# Altium PCB MB_v1.PcbDoc (part 10 of 10)
Units mm, origin at the board's own origin, x right, y up, seen from the top; angles counter-clockwise.
Board outline 203 x 72 mm, 6 copper layers (Top Layer, Layer 3, Layer 1, Layer 2, Layer 4, Bottom Layer), stack 1.52 mm thick; 655 components, 569 nets, 2943 pads, 1834 vias.
Unrouted connection lines stored in the file: 31.
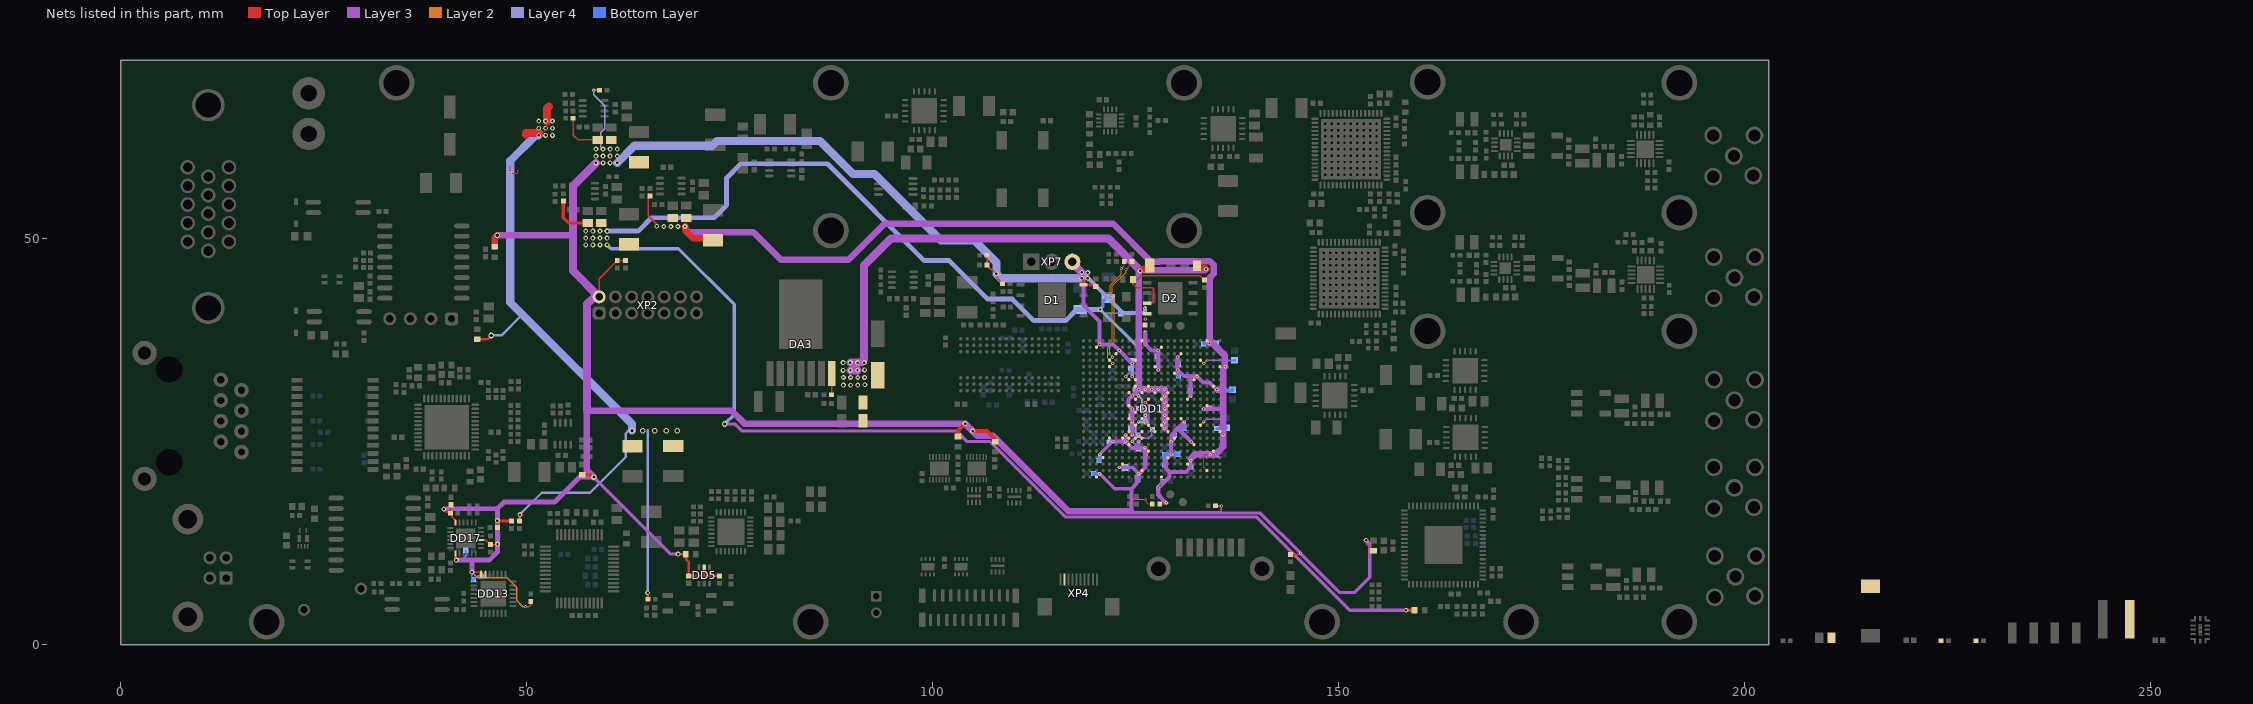
[diagram p13: the nets of this part, all layers, seen from the top]

## Via types
v1: diameter 0.4, hole 0.2, Top Layer to Bottom Layer, tented both sides, 654 vias
v2: diameter 0.8, hole 0.4, Top Layer to Bottom Layer, tented both sides, 489 vias
v3: diameter 0.6, hole 0.3, Top Layer to Bottom Layer, tented both sides, 354 vias
v4: diameter 0.7, hole 0.4, Top Layer to Bottom Layer, tented both sides, 144 vias
v5: diameter 0.8, hole 0.4, Top Layer to Bottom Layer, 87 vias
v6: diameter 0.9, hole 0.5, Top Layer to Bottom Layer, 45 vias
v7: diameter 0.66, hole 0.4, Top Layer to Bottom Layer, 25 vias
v8: diameter 0.7, hole 0.3, Top Layer to Bottom Layer, 13 vias
v9: diameter 0.5, hole 0.2, Top Layer to Bottom Layer, 12 vias
v10: diameter 0.5, hole 0.3, Top Layer to Bottom Layer, 5 vias
v11: diameter 1, hole 0.5, Top Layer to Bottom Layer, 2 vias
v12: diameter 0.4, hole 0.2, Top Layer to Bottom Layer, 2 vias
v13: diameter 0.9, hole 0.4, Top Layer to Bottom Layer, tented both sides, 2 vias

## Nets (pads, with @x,y where several pads share a name; then routed paths per layer and width w, separated by ;. In a path a pad name is that pad's centre, name@x,y a point inside that pad or via, vN(x,y) a via of type N, cw(c..) or ccw(c..) an arc to the next point about the centre after c; other vN are vias at no path point) (continued)
VDD_1V0: C19.2 C25.1 C42.2 C45.2 C47.2 C49.2 C51.2 C53.2 C55.2 C56.2 C60.2 C61.2 C63.2 DA3.7 DD1.G8 DD1.H9 DD1.H11 DD1.J8 DD1.J10 DD1.J12 DD1.J14 DD1.K13 DD1.L8 DD1.L14 DD1.M13 DD1.N8 DD1.N14 DD1.P13 DD1.R8 DD1.R14 R4.2 | length 108.8
  Top Layer w0.2: R4.2@87.55,30.775 87.61,30.835 DA3.7@87.61,33.37 ; v1(123.811,33.026) DD1.G8@124.212,32.625 ; DD1.R8@124.212,26.225 v1(124.613,25.824) ; DD1.N8@124.212,27.825 v1(124.613,27.424) ; DD1.L8@124.212,29.425 v1(124.613,29.024) ; DD1.J8@124.212,31.025 v1(124.613,30.624) ; DD1.H9@125.012,31.825 v1(125.413,31.424) ; DD1.J10@125.812,31.025 v1(126.213,31.426) ; DD1.H11@126.612,31.825 v1(127.013,31.424) ; DD1.J12@127.412,31.025 v1(127.813,31.426) ; DD1.P13@128.212,27.025 v1(128.613,27.426) ; DD1.M13@128.212,28.625 v1(128.613,29.026) ; DD1.K13@128.212,30.225 v1(128.613,30.626) ; v1(128.611,26.626) DD1.R14@129.012,26.225 ; v1(128.611,28.226) DD1.N14@129.012,27.825 ; v1(128.611,29.826) DD1.L14@129.012,29.425 ; v1(128.611,31.426) DD1.J14@129.012,31.025
  Top Layer w0.8: v3(125.576,46.024) 125.777,46.225 126.6,46.225 126.775,46.4 C45.2@126.775,46.675 ; C49.2@132.575,46.65 132.575,46.5 132.675,46.4 133.525,46.4 v3(133.7,46.225)
  Layer 3 w0.2: v1(123.811,33.026) 123.813,33.026 124.287,33.5 125.223,33.5 125.413,33.31
  Layer 3 w0.5: v1(124.613,25.824) v1(124.613,27.424) v1(124.613,29.024) 124.175,29.462 124.175,30.185 v1(124.613,30.624) v1(125.413,31.424)
  Layer 3 w0.6: v1@128.611,29.024 v1(128.613,29.026) ; v1(128.611,31.426) v1@128.613,31.424
  Layer 3 w0.8: 125.4,38.2 125.4,45.848 v3(125.576,46.024) ; 125.413,38.187 125.413,33.31 v1(125.413,31.424) v1@126.211,31.424 ; v3@125.576,46.101 133.576,46.101 v3(133.7,46.225) ; v1@126.216,31.424 v1(127.013,31.424) ; v1@127.013,31.426 v1(127.813,31.426) v1(128.611,31.426) ; v1(128.611,26.626) v1(128.611,28.226) v1@128.611,29.024 ; v1(128.613,29.026) v1(128.613,30.626) v1@128.613,31.424
  Layer 3 w1: v3(89.9,34.725) 89.925,34.75 v3@90.675,34.75 ; v3(89.905,33.77) 90.754,33.77 v3(90.769,33.785) ; 90.35,33.785 90.35,34.725 ; v3(90.775,34.725) 91.206,34.725 91.575,35.094 91.575,46.7 94.875,50 121.677,50 v3@125.576,46.101
  Bottom Layer w0.2: v1(123.811,33.026) 124.305,33.521 124.305,33.815 C63.2@124.49,34
  Bottom Layer w0.3: C60.2@124.49,28.215 124.613,28.092 v1(124.613,27.424) ; C56.2@124.494,26.65 124.613,26.531 v1(124.613,25.824)
  other v3: 89.025,31.95 89.93,31.945 90.794,31.96 91.675,32 89.025,32.9 89.925,32.9 90.8,32.9 91.65,32.9 89,33.775 91.65,33.825 89,34.725 91.625,34.725
VDD_1V8: C33.2 C39.2 C48.2 C50.2 C57.2 C59.2 C62.2 C64.2 DD1.K9 DD1.K11 DD1.L10 DD1.M9 DD1.N10 DD1.P9 DD1.P11 DD1.R10 DD1.T9 L4.2 L8.1 L46.1 R13.2 | length 242.3
  Top Layer w0.2: v1(124.611,25.024) DD1.T9@125.012,25.425 ; DD1.P9@125.012,27.025 v1(125.413,27.426) ; DD1.M9@125.012,28.625 v1(125.413,29.026) ; DD1.K9@125.012,30.225 v1(125.413,30.626) ; v1(125.411,25.824) DD1.R10@125.812,26.225 ; DD1.N10@125.812,27.825 v1(126.213,28.226) ; DD1.L10@125.812,29.425 v1(126.213,29.024) ; v1(126.211,27.426) DD1.P11@126.612,27.025
  Top Layer w0.4: R13.2@54.536,54.637 54.536,52.589 55.201,51.924 C39.2@57.545,51.924 ; v3(158.326,4.225) L46.1@159.375,4.225
  Layer 3 w0.4: v4(74.425,27.175) 75.675,27.175 76.55,26.3 103,26.3 104.3,25 107.1,25 116.4,15.7 139.95,15.7 151.425,4.225 v3(158.326,4.225)
  Layer 4 w0.2: v1(125.411,25.824) 125.013,26.221 125.013,27.026 v1(125.413,27.426) ; v1(125.413,29.026) v1@125.415,29.025 ; v1(125.413,30.626) 125.813,30.226 125.813,29.025 ; v1(126.211,27.426) v1@126.212,27.428 ; v1@126.212,28.225 v1(126.213,28.226) ; v1(126.213,29.024) v1(126.213,29.024)
  Layer 4 w0.4: v3(59.925,49.225) 60.4,48.75 68.725,48.75 75.575,41.9 75.575,28.325 v4(74.425,27.175) ; v3(120.675,41.275) 125.275,36.675 125.275,32.075 124.875,31.675 124.875,31.165 v1(125.413,30.626) ; v1(124.611,25.024) v1(125.411,25.824) ; v1(125.413,27.426) v1(126.211,27.426) ; v1@125.415,29.025 125.813,29.025 v1(126.213,29.024) ; v1@126.212,27.428 v1@126.212,28.225 ; v1(126.213,28.226) v1(126.213,29.024)
  Layer 4 w0.6: v3(59.925,50.925) 63.75,50.925 65.4,52.575 73.1,52.575 74.65,54.125 74.65,57.475 76.4,59.225 87.075,59.225 99.013,47.287 102.059,47.287 106.796,42.55 109.843,42.55 112.483,39.91 116.425,39.91 117.79,41.275 v3(120.675,41.275)
  Bottom Layer w0.2: v3@120.728,41.275 121.203,40.8 L8.1@123.195,40.8 ; v1(124.611,25.024) 125.011,24.624 125.293,24.624 125.411,24.506 125.411,24.08 C62.2@125.402,24.072
  Bottom Layer w0.4: C50.2@118.2,41.275 v3(120.675,41.275) ; v3@120.713,41.329 120.713,41.367 121,41.654 121,42.25 121.375,42.625 C48.2@121.65,42.625
  other v3: 57.3,49.225 58.175,49.225 59.05,49.225 57.3,50.075 58.175,50.075 59.05,50.075 59.925,50.075 57.3,50.925 58.175,50.925 59.05,50.925
VDD_2V5: C30.2 C36.2 C134.2 C135.2 C138.2 C139.2 C142.2 C143.2 C145.2 C147.2 C148.2 C149.2 C150.2 C151.2 C152.2 C153.2 C154.2 C156.2 C157.2 C158.2 C159.2 C160.2 C161.2 DD1.A20 DD1.AA20 DD1.AB13 DD1.C16 DD1.D19 DD1.E22 DD1.F15 DD1.G18 DD1.H21 DD1.K17 DD1.L20 DD1.N16 DD1.P19 DD1.R22 DD1.T15 DD1.U18 DD1.V21 DD1.W14 DD1.Y17 L1.2 R7.2 R61.2 | length 177.8
  Top Layer w0.125: v1(127.817,19.292) 128.212,19.687 DD1.AB13@128.212,20.625 ; DD1.AA20@133.807,21.425 133.4,21.832 133.4,23.161 133.651,23.413 134.197,23.413 v1(134.211,23.399)
  Top Layer w0.2: R7.2@65.228,55.264 65.028,55.064 65.028,54.975 65,54.947 65,52.825 66.05,51.775 v3(66.05,51.525) ; R61.2@128,17.325 128.608,17.325 128.746,17.462 v1(128.8,17.462) ; DD1.W14@129.012,23.025 v1(129.413,23.426) ; v1(129.425,25) 129.425,25.019 129.812,25.406 DD1.T15@129.812,25.425 ; DD1.F15@129.812,33.425 v1(130.213,33.826) ; v1@130.213,35.425 DD1.C16@130.612,35.825 ; DD1.N16@130.612,27.825 v1(131.013,27.424) ; DD1.Y17@131.412,22.225 v1(131.813,22.626) ; DD1.K17@131.412,30.225 v1(131.813,30.626) ; v1(131.885,24.952) DD1.U18@132.212,24.625 ; DD1.G18@132.212,32.625 132.212,32.643 132.613,33.045 v1(132.613,33.063) ; DD1.P19@133.012,27.025 v1(133.413,27.426) ; DD1.D19@133.012,35.025 v1(133.413,34.624) ; v1(133.411,29.024) DD1.L20@133.812,29.425 ; DD1.A20@133.812,37.425 v1(134.132,37.105) ; v1(134.211,23.399) 134.211,23.424 DD1.V21@134.612,23.825 ; DD1.H21@134.612,31.825 v1(135.013,31.424) ; DD1.R22@135.412,26.225 v1(135.813,25.824) ; DD1.E22@135.412,34.225 v1(136.075,34.225)
  Top Layer w0.8: v3(69.525,51.5) 69.525,51.025 70.525,50.025 72.75,50.025 L1.2@72.975,49.8
  Layer 3 w0.2: v1(133.413,27.426) 133.762,27.775 135.813,27.775 ; v1(133.413,34.624) 133.813,35.024 135.179,35.024 135.19,35.034 135.981,35.034 136.025,34.99
  Layer 3 w0.5: v1(128.8,17.462) 127.817,18.445 v1(127.817,19.292) 129.189,20.664 129.189,21.274 ; v1(130.213,35.424) v1(130.213,35.424) v1(130.213,33.826) 130.977,33.063 131.795,33.063 ; v1(131.013,27.424) 130.219,26.629 ; v1(131.813,22.626) 131.813,21.846 131.241,21.274 129.189,21.274 ; v1(131.813,30.626) 131.795,30.644 131.795,33.063 ; v1(131.885,24.952) 131.885,24.964 130.219,26.629 ; v1(133.411,29.024) 135.8,29.024 ; v1(135.013,31.424) 134.137,32.3 133.325,32.3 132.613,33.011 v1(132.613,33.063) 131.795,33.063 ; 129.189,21.274 128.775,21.687 128.775,22.788 v1(129.413,23.426) 129.413,24.988 v1(129.425,25) 129.425,25.835 130.219,26.629
  Layer 3 w0.8: 69.525,51.2 69.95,50.775 77.959,50.775 81.309,47.425 89.7,47.425 94.1,51.825 122.27,51.825 126.927,47.168 127.86,47.168 127.917,47.225 134.181,47.225 134.65,46.756 134.65,45.675 134.132,45.157 v1(134.132,37.105) 134.495,37.105 136.025,35.575 136.025,34.99 v1@136.025,34.275 ; 131.813,22.88 132.357,23.424 134.186,23.424 v1(134.211,23.399) ; v1@134.211,23.424 134.856,23.424 135.813,24.381 v1(135.813,25.824) 135.813,27.775 135.813,33.963 v1(136.075,34.225) ; v1@135.062,31.375 135.733,31.375
  Bottom Layer w0.3: v1(131.813,22.626) 131.825,22.615 C134.2@131.825,21.87 ; C138.2@133.383,37.037 C138.2@133.45,37.105 ; C150.2@133.509,23.37 133.537,23.399 v1(134.211,23.399) 134.951,23.399 C143.2@134.98,23.37 ; C142.2@134.92,37.105 C142.2@134.95,37.135 ; C152.2@135.024,26.61 135.569,26.61 ; 135.569,26.613 135.569,26.61 ; v1(135.813,25.824) 135.569,26.068 135.569,26.61 ; v1(136.075,34.225) 136.075,34.94 C149.2@136.025,34.99 137.215,34.99 C161.2@137.225,35 ; C160.2@136.25,26.72 136.139,26.61 135.569,26.61
  Bottom Layer w0.4: v1(127.817,19.292) 127.817,19.497 C153.2@128.413,20.092 ; C156.2@130.213,33.147 v1(130.213,33.826) ; C159.2@130.213,34.673 v1(130.213,35.424) ; C138.2@133.45,37.105 v1(134.132,37.105) C142.2@134.92,37.105
  Bottom Layer w0.5: C148.2@128.575,22.135 128.588,22.148 128.588,23.4 C135.2@128.6,23.413 128.614,23.426 v1(129.413,23.426) 130.216,23.426 C139.2@130.225,23.435 ; v1(129.425,25) 129.742,25.317 129.742,25.695 C147.2@129.812,25.765 ; C156.2@130.213,33.147 C156.2@130.275,33.085 ; C159.2@130.213,34.673 C159.2@130.285,34.6 ; C158.2@131,26.61 131.013,26.624 v1(131.013,27.424) ; C151.2@131.754,31.303 131.795,31.261 131.795,30.645 v1(131.813,30.626) ; v1(133.411,29.024) 133.752,29.024 133.759,29.03 134.045,29.03 C157.2@134.115,29.1 ; v1(135.013,31.424) 135.462,31.424 C154.2@135.825,31.061 136.079,31.315 136.877,31.315 C145.2@136.975,31.413
  other v3: 66.9,51.5 67.775,51.5 68.65,51.5
VDD_3V3: C5.2 C32.2 C34.2 C38.2 C40.2 C66.2 C68.2 C69.2 C71.2 C75.2 C81.2 C111.2 C132.2 C133.2 C136.2 C140.2 C144.2 D1.8 D2.7 D2.8 DD1.A10 DD1.AA10 DD1.AB3 DD1.B3 DD1.B13 DD1.C6 DD1.D9 DD1.E12 DD1.G9 DD1.R12 DD1.T5 DD1.T7 DD1.T8 DD1.T10 DD1.U8 DD1.V11 DD1.W4 DD1.Y7 DD5.5 DD13.6 DD13.7 DD17.1 DD17.9 DD17.18 L5.2 L9.1 L11.1 L12.1 L13.1 L17.1 L48.1 L60.1 R15.2 R20.1 R21.1 R22.2 R23.1 R24.1 R25.1 R26.1 R27.2 R28.2 R31.1 R32.1 R37.2 R59.2 R160.2 R162.2 R163.2 R165.2 R172.2 XP2.2 XP7.3 | length 448.2
  Top Layer w0.125: v1(126.25,17.875) 126.25,17.625 126.55,17.325 R24.1@127.075,17.325
  Top Layer w0.2: v3(39.8,16.675) 40.18,16.295 40.505,16.295 R165.2@40.625,16.175 ; C111.2@40.7,17.215 40.625,17.14 R165.2@40.625,16.175 ; DD17.1@41.25,11.225 41.256,11.219 41.256,10.624 41.369,10.511 v3(41.369,10.402) ; DD17.18@41.25,15.025 41.25,15.298 41.235,15.313 41.235,15.315 40.812,15.738 40.812,15.988 R165.2@40.625,16.175 ; v3@43.275,8.9 44.402,8.9 DD13.7@44.415,8.914 ; DD17.9@44.4,12.875 44.925,12.875 45,12.8 45.06,12.8 C32.2@45.55,12.31 46.36,12.31 v3(46.425,12.375) ; DD13.7@44.415,8.965 DD13.7@44.415,8.914 ; DD13.6@44.925,8.65 DD13.7@44.425,8.65 44.415,8.66 DD13.7@44.415,8.914 ; R163.2@46.425,14.4 v3@46.425,15.25 ; v1(49.875,4.675) 50.3,4.675 50.575,4.95 50.575,5.275 R162.2@50.525,5.325 ; R15.2@55.73,64.835 55.75,64.815 55.75,62.75 56.33,62.17 C40.2@58.786,62.17 ; v1(58.275,68.275) 58.287,68.287 R28.2@58.992,68.287 ; XP2.2@58.95,42.825 58.95,45.075 R20.1@61.175,47.3 R21.1@62.2,47.3 ; R32.1@106.725,47.95 106.725,46.766 R31.1@106.7,46.741 107.791,45.65 v3(107.875,45.65) 107.952,45.573 107.952,45.148 R22.2@108.65,44.45 ; DD1.AB3@120.212,20.625 v1(120.613,21.026) ; DD1.B3@120.212,36.625 DD1.B3@120.212,36.625 120.575,36.986 v1(120.577,36.986) ; v1(120.611,23.426) DD1.W4@121.012,23.025 ; DD1.T5@121.81,25.423 v1(122.212,25.022) ; DD1.C6@122.612,35.825 v1(123.013,36.226) ; v1(123.011,21.824) DD1.Y7@123.412,22.225 ; DD1.T7@123.412,25.425 v1(123.813,25.826) ; v1(123.811,25.024) DD1.T8@124.212,25.425 ; v1@123.813,25.028 123.814,25.027 DD1.U8@124.214,24.627 ; v1(124.61,33.026) DD1.G9@125.012,32.625 ; v1(124.611,34.624) DD1.D9@125.012,35.025 ; v1(125.411,25.024) DD1.T10@125.812,25.425 ; v1(125.423,21.029) 125.812,21.418 DD1.AA10@125.812,21.425 ; DD1.A10@125.812,37.425 v1(126.213,37.024) ; v1(126.213,24.228) DD1.V11@126.614,23.827 ; v1(126.213,29.824) v1(126.213,29.824) 126.612,30.224 126.612,30.225 ; D2.7@126.468,42.037 126.525,42.094 127.176,42.094 127.225,42.143 127.225,43.8 127.075,43.95 125.175,43.95 124.705,44.42 L9.1@124.705,44.95 125.238,44.95 125.713,45.425 132.97,45.425 R26.1@133.495,44.9 ; v1(127.011,26.626) DD1.R12@127.412,26.225 ; DD1.E12@127.412,34.225 v1(127.813,33.824) ; v1(127.811,36.224) DD1.B13@128.212,36.625 ; R59.2@134.875,17.1 134.9,17.075 v1(135.575,17.075) ; R23.1@144.125,11.1 145.146,11.1 145.296,11.25 v1(145.35,11.25) ; v3(153.425,12.85) 153.454,12.821 153.454,12.431 154.003,11.882 154.003,11.807 154.248,11.562 L48.1@154.323,11.562
  Top Layer w0.3: v3(68.675,11.15) 68.699,11.126 L60.1@69.605,11.126 69.693,11.038 69.693,10.432 69.977,10.148 C81.2@69.977,8.461 71.877,8.461 ; DD5.5@71.882,9.534 71.882,8.466 71.877,8.461 ; R37.2@73.787,8.451 73.777,8.461 71.877,8.461 ; v3(118.375,45.125) 118.6,44.9 118.6,44.42 118.666,44.354 119.321,44.354 119.45,44.225 120.015,44.225 C66.2@120.125,44.115
  Top Layer w0.4: v3(46.41,15.265) 46.425,15.25 46.443,15.232 48.118,15.232 R172.2@48.15,15.2 ; L17.1@56.655,20.775 56.8,20.92 L17.1@56.875,20.92 57.924,20.92 58.219,20.625 v4(58.3,20.625)
  Top Layer w0.5: L12.1@103.161,25.632 103.209,25.68 103.209,26.409 v3(104.025,27.225) ; v3(104.95,26.3) 106.725,26.3 107.563,25.462 107.563,25.084 107.658,24.989 L13.1@107.733,24.989
  Top Layer w0.8: L11.1@46.085,48.989 46.105,49.009 46.105,50.13 v4(46.389,50.414)
  Layer 3 w0.125: 124.5,17.775 124.6,17.875 v1(126.25,17.875)
  Layer 3 w0.2: v1(125.411,25.024) 125.811,25.424 126.611,25.424 127.011,25.824 v1(127.011,26.626) 126.613,27.024 126.613,29.423 v1(126.213,29.824) ; 135.55,16.2 135.575,16.225 v1(135.575,17.075)
  Layer 3 w0.4: v3@46.41,12.39 v3(46.425,12.375) ; v4(58.3,20.625) 67.775,11.15 v3(68.675,11.15) ; v1(120.613,21.026) 122.452,19.188 124.5,19.188 ; v1@120.616,23.426 v1(122.212,25.022) ; v1(123.011,21.824) 124.629,21.824 v1(125.423,21.029) ; 124.5,16.45 124.725,16.225 135.575,16.225 ; 135.55,16.2 140.4,16.2 v1(145.35,11.25) 145.35,11.2 150.15,6.4 151.95,6.4 153.854,8.304 153.854,12.421 v3(153.425,12.85)
  Layer 3 w0.5: 118.6,44.9 118.6,41.775 120.577,39.798 v1(120.577,36.986) 122.254,36.986 v1(123.013,36.226) 124.611,34.629 v1(124.611,34.624) ; v1(122.212,25.022) 123.809,25.022 v1(123.811,25.024) 123.811,25.824 v1(123.813,25.826) ; v1@123.813,25.028 124.613,24.228 125.409,24.228 ; 124.5,16.45 124.5,17.775 124.5,19.188 125.137,19.825 125.137,20.743 v1(125.423,21.029) 126.213,21.818 v1(126.213,24.228) 125.409,24.228 ; v1(125.411,25.024) 125.411,24.23 125.409,24.228 ; v1@126.213,38.472 v1(126.213,37.024) 127.014,36.224 v1(127.811,36.224) 127.813,36.221 v1(127.813,33.824)
  Layer 3 w0.6: v3(39.8,16.675) 39.86,16.735 46.41,16.735 ; v3(41.369,10.402) 43.386,10.402 ; v3(43.275,8.911) 43.275,10.292 43.386,10.402 ; v3@46.41,12.39 v3(46.41,15.265) 46.41,16.735 ; v3(46.425,12.375) 46.425,11.425 45.402,10.402 43.386,10.402 ; v4(58.3,20.625) 56.525,20.625 53.825,17.925 53.825,17.901 53.474,17.55 47.225,17.55 46.41,16.735
  Layer 3 w0.8: v4(46.389,50.414) 55.689,50.414 55.725,50.45 ; v4(58.3,20.625) 57.45,21.475 57.45,28.875 57.525,28.8 75.275,28.8 76.85,27.225 v3(104.025,27.225) v3(104.95,26.3) 105.5,25.75 107.425,25.75 116.725,16.45 124.5,16.45
  Layer 3 w1: 57.45,28.875 57.45,41.939 58.221,42.71 58.835,42.71 XP2.2@58.95,42.825 55.725,46.05 55.725,50.45 55.725,56.5 v3(58.55,59.325) ; XP7.3@117.24,47.15 117.24,47.01 v3(118.4,45.85)
  Layer 2 w0.2: v3(43.275,8.911) 43.969,8.216 47.609,8.216 48.775,7.05 48.775,5.442 49.542,4.675 v1(49.875,4.675)
  Layer 4 w0.2: v1(58.275,68.275) 58.275,67.717 59.62,66.372 59.62,63.545 59.125,63.05 59.125,61.325 v3(59.425,61.025)
  Layer 4 w0.4: v1(124.61,33.026) v1(124.611,34.624)
  Layer 4 w0.5: v3@119.15,45.075 119.225,45 119.275,45 123.45,40.825 126.175,40.825 v1(126.175,41.425)
  Layer 4 w1: v3(61.175,59.325) 63.3,61.45 72.875,61.45 73.45,62.025 86.15,62.025 90.2,57.975 92.85,57.975 101.075,49.75 105.2,49.75 107.875,47.075 v3(107.875,45.65) 108.4,45.125 v3(118.375,45.125) ; v3@118.4,45.363 118.55,45.363 118.713,45.363
  Bottom Layer w0.2: v3(41.369,10.402) 42.027,10.402 42.515,10.89 C38.2@42.515,11.625 ; v3(43.275,8.911) 43.275,7.989 43.396,7.868 43.396,7.946 R160.2@43.45,8 43.65,8.2 43.729,8.2 43.978,8.449 C5.2@44.514,8.449
  Bottom Layer w0.4: C136.2@119.914,21.026 v1(120.613,21.026) ; C132.2@120.611,22.686 v1(120.611,23.426) ; v1(123.011,21.824) C144.2@123.773,21.824 ; C133.2@125.423,20.372 v1(125.423,21.029) ; C75.2@126.215,23.595 v1@126.215,24.226 ; C69.2@127.69,35.475 127.81,35.595 v1(127.811,36.224)
  Bottom Layer w0.5: C136.2@119.858,21.082 C136.2@119.914,21.026 ; C132.2@120.519,22.686 C132.2@120.589,22.756 ; C144.2@123.773,21.824 C144.2@123.775,21.825 ; C133.2@125.335,20.275 C133.2@125.405,20.345 ; C75.2@126.215,23.595 C75.2@126.25,23.56
  other v1: 126.199,38.486 126.2,40.1
  other v3: 119.15,45.125 119.15,45.825 59.425,59.325 60.3,59.325 58.55,60.175 59.425,60.175 60.3,60.175 61.175,60.175 58.55,61.025 60.3,61.025 61.175,61.025
VDD_5V0: C?.1@215.537,7.176 C?.2@210.736,0.826 L10.1 L59.1 L62.1 L?.2 R44.2 R170.2 R?.1@224.237,0.476 R?.1@228.562,0.476 XP4.2 | length 98.5
  Top Layer w0.125: 47.925,58.9 48,58.825 v1(48,58.05) 48.877,58.05 48.95,58.123 48.95,58.4 49.05,58.5
  Top Layer w0.3: L10.1@43.942,37.597 45.172,37.597 v4(45.65,38.075) ; R170.2@49.15,15.2 49.163,15.213 49.163,15.988 v3(49.175,16) ; v3(64.925,6.375) 64.94,6.36 64.94,5.603 R44.2@64.955,5.588
  Top Layer w1: 49.95,62.85 49.95,63 v3@51.6,63 ; v3@52.537,64.45 52.537,66.063 52.75,66.275
  Layer 4 w0.3: v4(45.65,38.075) 46.9,38.075 49.45,40.625 49.525,40.625 ; v3(49.175,16) 51.875,18.7 57.8,18.7 62.225,23.125 62.225,26 62.575,26.35 v4(63,26.35) ; v3(64.925,6.375) 64.925,26.375
  Layer 4 w1: v3(51.5,62.725) 51.125,62.725 48,59.6 v1(48,58.05) 48,42.15 49.525,40.625 63,27.15 v4(63,26.35)
  other v3: 52.35,62.725 53.2,62.725 51.5,63.6 52.35,63.6 53.2,63.6 51.5,64.475 52.35,64.475 53.2,64.475
  other v4: 64.325,26.325 67.225,26.325 65.8,26.35 68.575,26.35
VMODE0: DD1.D5 R158.2 | length 13.8
  Top Layer w0.125: v1(123.85,46.2) 124.411,46.761 124.411,47.011 R158.2@124.575,47.175
  Top Layer w0.2: DD1.D5@121.812,35.025 v1(122.175,35.388)
  Layer 2 w0.125: v1(122.175,35.388) 121.812,35.75 121.812,36.789 122.387,37.364 122.387,42.714 122.162,42.939 122.162,44.186 123.85,45.874 v1(123.85,46.2)
VMODE1: DD1.E5 R159.2 | length 14.4
  Top Layer w0.125: v1(123.275,46.325) 123.625,46.675 R159.2@123.625,47.175
  Top Layer w0.2: DD1.E5@121.812,34.225 v1(122.213,34.626)
  Layer 2 w0.125: v1(122.213,34.626) 121.587,35.253 121.587,36.882 122.162,37.457 122.162,42.5 121.9,42.762 121.9,44.25 123.275,45.625 v1(123.275,46.325)
pads on no net: BQ1.2 BQ1.4 BQ2.2 BQ2.4 C?.2@251.548,0.526 DA13.2 DA13.4 DA13.5 DA13.6 DA13.9 DA13.10 DA14.18 DA15.18 DA16.2 DA16.4 DA16.5 DA16.6 DA16.9 DA16.10 DA17.2 DA17.4 DA17.5 DA17.6 DA17.9 DA17.10 DA18.6 DA18.7 DA19.6 DA19.7 DA20.2 DA20.4 DA20.5 DA20.6 DA20.8 DA20.9 DA20.11 DA20.12 DA21.2 DA21.4 DA21.5 DA21.6 DA21.9 DA21.10 DA?.4 DD1.A7 DD1.A8 DD1.A11 DD1.AA1 DD1.AA2 DD1.AA3 DD1.AA8 DD1.AA9 DD1.AA18 DD1.B7 DD1.B9 DD1.B10 DD1.B11 DD1.C4 DD1.C7 DD1.C8 DD1.C10 DD1.C12 DD1.C13 DD1.D7 DD1.D8 DD1.D10 DD1.D12 DD1.D13 DD1.D15 DD1.E8 DD1.E9 DD1.E10 DD1.E13 DD1.E14 DD1.E15 DD1.E16 DD1.F8 DD1.F9 DD1.F12 DD1.F16 DD1.F17 DD1.F19 DD1.G6 DD1.G15 DD1.G16 DD1.G17 DD1.G19 DD1.G20 DD1.G21 DD1.H15 DD1.H17 DD1.H18 DD1.H19 DD1.H20 DD1.L11 DD1.L16 DD1.M1 DD1.M2 DD1.M12 DD1.N2 DD1.N3 DD1.N15 DD1.N19 DD1.N20 DD1.P1 DD1.P2 DD1.P15 DD1.P16 DD1.R1 DD1.R3 DD1.R6 DD1.R7 DD1.R15 DD1.R16 DD1.R19 DD1.T1 DD1.T2 DD1.T3 DD1.T4 DD1.T6 DD1.T17 DD1.T19 DD1.U1 DD1.U2 DD1.U4 DD1.U5 DD1.U6 DD1.U7 DD1.U9 DD1.U12 DD1.U14 DD1.U19 DD1.V2 DD1.V4 DD1.V10 DD1.V12 DD1.V15 DD1.W1 DD1.W2 DD1.W3 DD1.W10 DD1.W11 DD1.W12 DD1.W15 DD1.W17 DD1.W18 DD1.Y1 DD1.Y3 DD1.Y10 DD1.Y15 DD1.Y18 DD1.Y20 DD1.Y21 DD2.7 DD2.13 DD3.7 DD3.13 DD6.J1 DD6.J9 DD6.L1 DD6.L9 DD6.M7 DD7.13 DD7.43 DD7.47 DD9.6 DD9.7 DD12.62 DD12.63 DD12.65 DD12.66 DD13.1 DD13.2 DD13.10 DD13.12 DD13.13 DD13.14 DD13.15 DD13.16 DD13.17 DD13.18 DD13.19 DD13.20 DD13.21 DD13.22 DD13.23 DD13.27 DD14.3 DD14.6 DD14.15 DD14.22 DD16.1 DD16.2 DD16.3 DD16.4 DD16.5 DD16.9 DD16.11 DD16.13 DD16.14 DD16.15 DD16.16 DD16.17 DD16.18 DD16.19 DD16.21 DD16.22 DD16.23 DD16.24 DD16.26 DD16.37 DD16.38 DD16.41 DD16.42 DD16.45 DD16.46 DD16.47 DD16.48 DD17.6 DD17.7 DD17.8 DD17.12 DD17.15 DD17.23 G1.1 T1.2 T2.2 VD1.2 VD2.2 VD3.4 XP2.12 XP2.14 XP3.0 XP4.0 XS1.0 XS3.6 XS3.7 XS3.8 XS3.9 XS3.10 Z1.2 Z1.3 Z1.6 Z1.7 Z4.1 Z4.2 Z4.7 Z4.8
copper on no net: | length 15.5
  Top Layer w0.3: 44.975,58.835 44.99,58.85 44.99,60.14 45,60.15 ; 45.65,60.15 45.65,59.285 46.075,58.86 46.985,58.86 47.025,58.9 47,58.875 47,57.935 46.975,57.91 ; 46.3,62.85 46.3,62 47.465,60.835 48.325,60.835 ; 46.95,60.15 46.95,59.938 46.973,59.915 48.325,59.915 ; v4(49.05,64.425) 49.05,66.275
  Layer 1 w0.3: v4(46.882,61.418) 49.05,63.585 v4(49.05,64.425)

## Polygon pours and split planes (outlines as drawn)
GND on Layer 4 "NONET_L05_P003" (solid, remove dead copper, shelved, pour order 3): 0.05,71.98 0.055,71.975 203,71.975 203,0.05 202.95,0.1 0.05,0.1
ANALOG_3V8 on Layer 4 "NONET_L05_P000" (solid, shelved, pour order 0): 80.4,67.525 83.875,67.525 86.475,64.925 91.55,64.925 91.55,61.975 91.6,61.925 85,61.925 84.3,62.625 80.4,62.625
no net on Top Solder (solid, shelved): 202 vertices, not listed, extent 14.949,-0.2 194.75,72
GND on Layer 3 "NONET_L02_P004" (solid, remove dead copper, shelved, pour order 4): 0.05,71.98 0.055,71.975 203,71.975 203,0.05 202.95,0.1 0.05,0.1
GND on Bottom Layer "NONET_L06_P002" (solid, remove dead copper, shelved, pour order 2): 0.05,71.98 0.055,71.975 203,71.975 203,0.05 202.95,0.1 0.05,0.1
no net on Bottom Solder (solid, shelved): 201 vertices, not listed, extent 14.949,-0.2 194.75,72
GND on Top Layer "NONET_L01_P001" (solid, remove dead copper, shelved, pour order 1): 0.05,71.98 0.055,71.975 203,71.975 203,0.05 202.95,0.1 0.05,0.1

## Keep-outs
Keep-Out Layer:
  the board outline again, w0.1

## Other copper
Top Layer:
  rectangle net VCC_12V0: 40.55,55.602 44.15,62.377
  region net VCC_12V0: 61.175,57.925 61.175,56.225 63.35,56.225 63.35,57.925
  rectangle net VCC_12V0: 61.025,66.575 62.725,68.675
  region net VCC_12V0: 78.375,58.3 76.675,58.3 76.675,56.125 78.375,56.125
  rectangle net VCC_12V0: 70.125,57.025 71.825,59.2
  rectangle net VCC_12V0: 98.55,45.35 100.275,46.55
  rectangle net VCC_12V0: 77.6,30.925 79.675,34.4
  rectangle net GND: 98.2,58.475 99.85,64.35
  rectangle net GND: 148.821,31.575 150.325,35.575
  rectangle net GND: 164.852,20.775 166.502,24.452
  rectangle net GND: 164.876,29.325 166.475,32.75
  rectangle net VDD_1V0: 87.525,31.625 94.05,35.25
  rectangle net VDD_1V0: 90.997,26.675 94.05,31.722
  rectangle net ANALOG_3V8: 90.05,59.5 91.55,64.8
  rectangle net VDD_5V0: 62.075,24.875 68.975,26.725
  rectangle net VDD_5V0: 51.1,62.3 53.55,64.95
  rectangle net DDR_1V5: 97.3,38.325 101.525,41.275
  rectangle net VDD_3V3: 58.125,58.65 62.775,61.85
  rectangle net VDD_3V3: 125.95,38.275 126.425,42.275
  rectangle net VDD_3V3: 118.05,44.75 119.475,46.225
  rectangle net VDD_1V8: 56.875,48.55 61.525,51.625
  rectangle net VDD_2V5: 65.625,50.2 70.35,52.2
  rectangle net ANALOG_3V8: 81.725,62.625 85.2,67.525
  rectangle net NetL58_1: 36.55,57.55 38.7,64.325
  rectangle net CHP: 81.275,11.3 82.575,17.25
  rectangle net ANALOG_3V8: 133.9,54.35 135.325,55.825
  rectangle net ANALOG_3V8: 141.1,25.75 142.525,27.225
  rectangle net ANALOG_3V8: 155.15,26.35 156.3,32.175
  pour cut-out: 115.8,38 115.8,31 103.2,31 103.2,38
  pour cut-out: 118.3,37.85 135.7,37.85 135.7,20.25 118.3,20.25
  pour cut-out: 189.455,10.103 189.455,6.232 182.463,6.232 182.463,10.103
  pour cut-out: 190.405,31.503 190.405,27.632 183.413,27.632 183.413,31.503
  pour cut-out: 190.392,20.721 190.392,16.85 183.4,16.85 183.4,20.721
  pour cut-out: 163.618,50.952 169.018,50.952 169.018,41.265 163.618,41.265
  pour cut-out: 163.425,66.138 168.825,66.138 168.825,56.45 163.425,56.45
  pour cut-out: 177.53,46.836 184.73,46.836 184.73,42.885 177.53,42.885
  pour cut-out: 177.475,61.925 184.675,61.925 184.675,57.975 177.475,57.975
Layer 3:
  rectangle net VCC_12V0: 41.95,55.602 44.15,62.377
  region net VCC_12V0: 63.3,56.2 63.3,57.9 61.5,57.9 61.5,56.2
  rectangle net VCC_12V0: 61.025,66.95 62.725,68.75
  rectangle net VCC_12V0: 70.125,57.4 71.825,59.2
  rectangle net VCC_12V0: 76.612,56.138 78.312,57.938
  rectangle net VDD_1V0: 87.525,31.625 94.05,35.25
  rectangle net VDD_3V3: 58.125,58.65 62.775,61.425
  rectangle net DDR_1V5: 97.3,38.325 101.725,40.15
  rectangle net VDD_3V3: 58.125,58.95 61.65,61.425
  rectangle net VDD_3V3: 118.05,44.75 119.475,46.225
  rectangle net VDD_2V5: 65.625,50.2 70.35,52.2
  rectangle net NetL58_1: 21.15,57.55 38.825,64.975
  pour cut-out: 190.423,31.521 190.423,27.65 183.431,27.65 183.431,31.521
  pour cut-out: 189.442,10.103 189.442,6.232 182.449,6.232 182.449,10.103
  pour cut-out: 190.392,20.8 190.392,16.85 183.4,16.85 183.4,20.8
  pour cut-out: 163.618,50.952 169.018,50.952 169.018,41.265 163.618,41.265
  pour cut-out: 163.425,66.138 168.825,66.138 168.825,56.45 163.425,56.45
  pour cut-out: 177.53,46.836 184.73,46.836 184.73,42.885 177.53,42.885
  pour cut-out: 177.475,61.925 184.675,61.925 184.675,57.975 177.475,57.975
Layer 1:
  pour cut-out: 190.405,31.503 190.405,27.632 183.413,27.632 183.413,31.503
  pour cut-out: 189.442,10.103 189.442,6.232 182.449,6.232 182.449,10.103
  pour cut-out: 190.392,20.8 190.392,16.85 183.4,16.85 183.4,20.8
  pour cut-out: 163.618,50.952 169.018,50.952 169.018,41.265 163.618,41.265
  pour cut-out: 163.425,66.138 168.825,66.138 168.825,56.45 163.425,56.45
  pour cut-out: 177.53,46.836 184.73,46.836 184.73,42.885 177.53,42.885
  pour cut-out: 177.475,61.925 184.675,61.925 184.675,57.975 177.475,57.975
Layer 2:
  pour cut-out: 190.405,31.503 190.405,27.632 183.413,27.632 183.413,31.503
  pour cut-out: 189.442,10.103 189.442,6.232 182.449,6.232 182.449,10.103
  pour cut-out: 190.392,20.8 190.392,16.85 183.4,16.85 183.4,20.8
  pour cut-out: 163.618,50.952 169.018,50.952 169.018,41.265 163.618,41.265
  pour cut-out: 163.425,66.138 168.825,66.138 168.825,56.45 163.425,56.45
  pour cut-out: 177.53,46.836 184.73,46.836 184.73,42.885 177.53,42.885
  pour cut-out: 177.475,61.925 184.675,61.925 184.675,57.975 177.475,57.975
Layer 4:
  rectangle net VCC_12V0: 76.65,56.175 78.35,57.975
  rectangle net VCC_12V0: 77.6,31.875 79.3,34.45
  rectangle net ANALOG_3V8: 81.875,63.525 85.3,67.525
  rectangle net ANALOG_3V8: 90.05,59.5 91.55,64.9
  rectangle net VDD_5V0: 62.075,25.85 68.975,26.725
  region net VDD_5V0: 53.575,62.3 53.575,64.95 51.1,64.95 51.1,62.3
  rectangle net VDD_3V3: 125.95,36.798 126.425,42.275
  rectangle net VDD_3V3: 118.05,44.75 119.475,46.225
  rectangle net VDD_1V8: 56.875,48.55 61.525,51.325
  rectangle net ANALOG_3V8: 133.9,54.35 135.325,55.825
  rectangle net ANALOG_3V8: 141.1,25.75 142.525,27.225
  rectangle net ANALOG_3V8: 155.175,26.75 156.325,31.775
  pour cut-out: 190.405,31.503 190.405,27.632 183.413,27.632 183.413,31.503
  pour cut-out: 189.455,10.103 189.455,6.232 182.463,6.232 182.463,10.103
  pour cut-out: 190.392,20.8 190.392,16.85 183.4,16.85 183.4,20.8
  pour cut-out: 163.618,50.952 169.018,50.952 169.018,41.265 163.618,41.265
  pour cut-out: 163.425,66.138 168.825,66.138 168.825,56.45 163.425,56.45
  pour cut-out: 177.53,46.836 184.73,46.836 184.73,42.885 177.53,42.885
  pour cut-out: 177.475,61.925 184.675,61.925 184.675,57.975 177.475,57.975
Bottom Layer:
  pour cut-out: 190.405,31.503 190.405,27.632 183.413,27.632 183.413,31.503
  pour cut-out: 189.442,10.103 189.442,6.232 182.449,6.232 182.449,10.103
  pour cut-out: 190.392,20.8 190.392,16.85 183.4,16.85 183.4,20.8
  pour cut-out: 163.618,50.952 169.018,50.952 169.018,41.265 163.618,41.265
  pour cut-out: 163.425,66.138 168.825,66.138 168.825,56.45 163.425,56.45
  pour cut-out: 177.53,46.836 184.73,46.836 184.73,42.885 177.53,42.885
  pour cut-out: 177.475,61.925 184.675,61.925 184.675,57.975 177.475,57.975

## Silkscreen, mask and mechanical layers (free items; w line width, h text height)
Top Overlay:
  text "+3V8" at 75.529,66.641 h1.52
  text "RX" at 196.679,65.004 h1.52
  text "+3V3" at 63.707,64.857 h1.52
  text "+5V0" at 49.604,60.354 h1.52
  text "+12V" at 28.621,60.129 h1.52 r90
  text "RXFB" at 195.579,49.529 h1.52
  text "+2V5" at 65.329,47.279 h1.52
  text "+1V5" at 93.929,47.254 h1.52
  text "+1V8" at 54.229,46.604 h1.52
  text "+1V0" at 89.379,24.379 h1.52
  text "TX" at 197.204,23.854 h1.52
  text "+1V2" at 47.579,17.029 h1.52
  text "SPK" at 90.454,8.854 h1.52
Top Solder:
  lines w3: 33.683,67.734 ccw(c34,69.2) 35.424,69.671 ; 192.6,2.95 193,3.35
Bottom Solder:
  lines w3: 33.555,67.768 ccw(c34,69.2) 35.395,69.751
Экран:
  lines w0.2: 16.335,16.653 ccw(c17.2,14.85) 15.2,14.85 15.2,0 86.077,0 ccw(c85,2.8) 87.277,4.754 ; 16.347,16.662 ccw(c15.2,18.3) 17.2,18.3 17.2,59 29.2,59 ; 18.2,7.2 ccw(c20.2,7.2) 19.355,5.387 ; 18.21,7.2 18.204,13.365 cw(c20.097,13.365) 19.011,14.916 ; 19.065,14.947 ccw(c18.2,16.75) 20.2,16.75 20.2,54 cw(c22.2,54) 22.2,56 34.2,56 34.2,64.8 cw(c36.2,64.8) 35.355,66.613 ; 19.15,15.004 19.2,15.032 ; 19.326,5.402 cw(c18,2.8) 20.578,4.171 ; 20.587,4.155 ccw(c22.4,5) 22.4,3 ; 22.259,3 80.5,3 ccw(c80.5,6) 83.5,6 83.5,10.5 cw(c89.5,10.5) 89.5,16.5 ; 29.1,59 ccw(c29.1,61) 31.1,61 31.1,72 194.8,72 194.8,0 146.719,0 ; 35.371,66.622 ccw(c34,69.2) 36.602,67.874 ; 36.587,67.845 cw(c38.4,67) 38.4,69 83,69 cw(c83,66) 86,66 86,54.97 cw(c83,54.97) 85.215,52.947 ; 85.232,52.963 ccw(c87.5,51) 89.359,48.645 ; 87.268,4.746 cw(c89.5,6.75) 86.5,6.75 86.5,10.5 cw(c89.5,10.5) 89.5,13.5 143.5,13.5 cw(c143.5,10.5) 146.5,10.5 146.5,6.77 cw(c143.5,6.77) 145.715,4.747 ; 89.214,48.533 cw(c91.056,46.259) 91.056,49.185 127.03,49.494 ; 89.375,16.5 143.5,16.5 cw(c143.5,10.5) 149.5,10.5 149.5,6 ccw(c152.5,6) 152.5,3 168,3 ccw(c168,6) 171,6 171,34.109 ccw(c168,34.109) 168,37.109 ; 92,52.3 cw(c92,55.3) 89,55.3 89,66 cw(c92,66) 92,69 126.5,69 cw(c126.5,66) 129.5,66 129.5,55.5 cw(c126.5,55.5) 126.5,52.5 ; 92,52.306 126.5,52.487 ; 127.03,49.5 cw(c127.03,46.5) 129.053,48.715 ; 129.037,48.732 ccw(c131,51) 133.231,53.005 ; 133.235,53.008 cw(c135.5,54.975) 132.5,54.975 132.5,66 cw(c135.5,66) 135.5,69 156.5,69 cw(c156.5,66) 159.5,66 159.5,57.15 cw(c156.5,57.15) 158.68,55.089 ; 145.732,4.763 ccw(c148,2.8) 146.719,0.087 ; 158.674,55.095 ccw(c161,53.2) 158.687,51.29 ; 158.694,51.297 cw(c156.5,49.25) 159.5,49.222 ; 158.715,40.547 ccw(c156.5,42.57) 159.5,42.57 159.5,49.222 ; 158.732,40.563 ccw(c161,38.6) 163.005,36.369 ; 163.008,36.365 cw(c164.975,34.1) 164.975,37.1 168,37.1 ; 177,37.1 188.8,37.1 cw(c188.8,34.1) 191.8,34.1 191.8,7.225 ; 177,37.109 ccw(c177,34.109) 174,34.109 174,6 ccw(c177,6) 177,3 187.6,3 ccw(c187.6,5) 189.413,4.155 ; 189.398,4.126 cw(c192,2.8) 190.629,5.378 ; 189.413,67.845 ccw(c187.6,67) 187.6,69 165.5,69 ccw(c165.5,66) 162.5,66 162.5,57.7 ccw(c165.5,57.7) 165.5,54.7 188.8,54.7 ccw(c188.8,57.7) 191.8,57.7 191.8,64.8 ccw(c189.8,64.8) 190.645,66.613 ; 189.422,67.829 ccw(c192,69.2) 190.674,66.598 ; 190.645,5.387 ccw(c189.8,7.2) 191.8,7.2 ; 162.5,43.1 ccw(c165.5,43.1) 165.5,40.1 188.8,40.1 ccw(c188.8,43.1) 191.8,43.1 191.8,48.7 ccw(c188.8,48.7) 188.8,51.7 165.5,51.7 ccw(c165.5,48.7) 162.5,48.7 162.5,43.1